# EAGLE board Board (EAGLE 9.6.2)
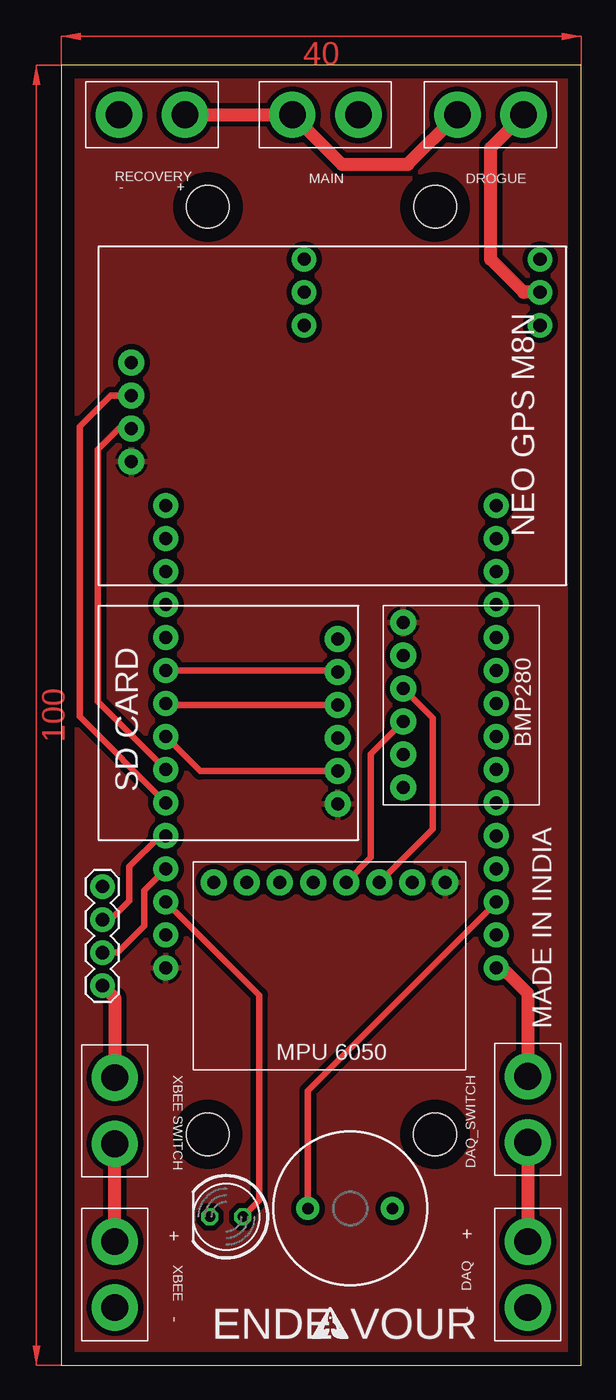
[diagram p0: board, top side]
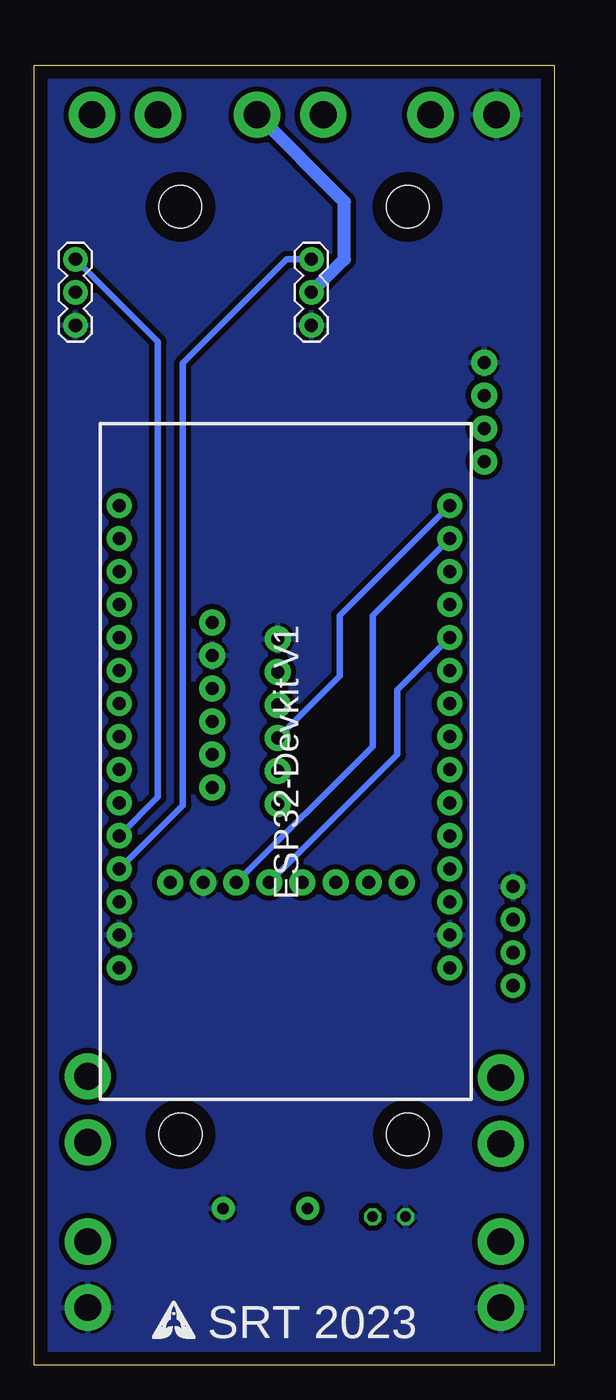
[diagram p1: board, bottom side, seen from below]

Size 40 x 100 mm. Coordinates in mm from the lower left corner, seen from the top.
Outline: 0,0 40,0 40,100 0,100 0,0
Copper layers (1*16): Top 0.035mm / dielectric 1.5mm / Bottom 0.035mm
Design rules "default": minimum track width 6mil, minimum drill 0.35mm, track to track 6mil, track to pad 6mil, pad to pad 6mil, via to via 6mil, smd to smd 6mil, copper to edge 40mil, drill to drill 6mil, minimum pad ring 10mil, minimum via ring 8mil, stop-mask expansion 4mil, vias tented up to drill 0mil, thermal gap 10mil
Holes 3.3 mm at 11.28,89.12 28.76,89.12 11.27,17.77 28.75,17.77

## Footprints (pad centres in the part's own frame; a part is rotated, then mirrored left to right if it is on the bottom)
1X03 = drill 1.016 pad 1.88: 1 0,0; 2 2.54,0; 3 5.08,0
1X02_XTRA_BIG = drill 2.057 pad 3.556: 1 -2.54,0; 2 2.54,0
1X04 = drill 1.016 pad 1.88: 1 0,0; 2 2.54,0; 3 5.08,0; 4 7.62,0
LED5MM = drill 0.813 octagon: A -1.27,0; K 1.27,0
BUZZER-12MM = drill 0.9 pad 1.778: + 3.25,0; - -3.25,0
ESP32-DEVKITV1 = drill 1 pad 1.93: 3V3 -16.52,-12.27; D1 13.96,-12.27; D2 -8.9,-12.27; D3 11.42,-12.27; D4 -6.36,-12.27; D5 1.26,-12.27; D12 -8.9,13.135; D13 -11.44,13.135; D14 -6.36,13.135; D15 -11.44,-12.27; D16 -3.82,-12.27; D17 -1.28,-12.27; D18 3.8,-12.27; D19 6.34,-12.27; D21 8.88,-12.27; D22 16.5,-12.27; D23 19.04,-12.27; D25 1.26,13.135; D26 -1.28,13.135; D27 -3.82,13.135; D32 6.34,13.135; D33 3.8,13.135; D34 11.42,13.135; D35 8.88,13.135; D36 16.5,13.135; D39 13.96,13.135; EN 19.04,13.135; GND@1 -13.98,13.135; GND@2 -13.98,-12.27; VIN -16.52,13.135
BMP280 = drill 1 pad 2: ADO -6.668,5.445; CSB -4.128,5.445; GND 3.493,5.445; SCL 0.953,5.445; SDA -1.587,5.445; VCC 6.032,5.445
MINISD = drill 1 pad 2: 3V3 1.587,15.24; CLK 1.587,7.62; CS 1.587,12.7; GND 1.587,2.54; MISO 1.587,5.08; MOSI 1.587,10.16
MPU6050 = drill 1 pad 2: ADO 1.587,4.128; GND 1.587,16.828; INT 1.587,1.587; SCL 1.587,14.287; SDA 1.587,11.748; VCC 1.587,19.367; XCL 1.587,6.668; XDA 1.587,9.207
NEOM8M = drill 1 pad 2: GND 8.89,2.54; RX 13.97,2.54; TX 11.43,2.54; VCC 16.51,2.54

## Placement (x,y rotation side)
J1  455-1750-1-ND  [1X03]  36.83,80.01 90 bottom
J2  455-1750-1-ND  [1X03]  18.68,80.01 90 bottom
J8  [1X02_XTRA_BIG]  6.99,96.2 180 top
J11  [1X04]  3.17,36.83 270 top
J12  [1X02_XTRA_BIG]  35.88,6.99 270 top
J13  [1X02_XTRA_BIG]  35.88,19.68 90 top
J14  [1X02_XTRA_BIG]  4.13,19.59 90 top
J15  [1X02_XTRA_BIG]  4.13,6.99 90 top
J16  [1X02_XTRA_BIG]  20.32,96.2 0 top
J17  [1X02_XTRA_BIG]  33.02,96.2 0 top
LED1  [LED5MM]  12.7,11.43 180 top
LS1  BUZZER-PTH  [BUZZER-12MM]  22.23,12.06 180 top
U$1  ESP32DEVKITV1  [ESP32-DEVKITV1]  20.32,47.1 90 bottom
U$2  BMP280  [BMP280]  31.75,51.12 90 top
U$3  MINISD  [MINISD]  22.86,58.42 180 top
U$4  MPU6050  [MPU6050]  10.16,38.73 270 top
U$5  NEOM8N  [NEOM8M]  2.86,86.04 270 top

## Library data of the parts
J1 J2 = SparkFun-Connectors; PROD_ID: XXX-00000
J8 J12-J17 = SparkFun-Connectors
J11 = SparkFun-Connectors; PROD_ID: CONN-09696
LED1 = led
LS1 = SparkFun-Electromechanical; PROD_ID: COMP-08253; SF_SKU: COM-07950
U$1 = ESP32-DEVKITV1
U$2 = BMP 280
U$3 = MINI SD CARD
U$4 = MPU6050
U$5 = neo gps m8n

## Nets
3V3: U$1.3V3 U$2.VCC U$3.3V3 U$4.VCC U$5.VCC
BUZZER: LS1.+ U$1.D13
CLK: U$1.D18 U$3.CLK
CS: U$1.D5 U$3.CS
DAQ_SWITCH: J12.1 J13.1
DAQ_VIN: J13.2 U$1.VIN
DROGUE: J1.3 U$1.D14
GND: J1.1 J2.1 J8.2 J11.1 J12.2 J15.1 LED1.K LS1.- U$1.GND@1 U$1.GND@2 U$2.GND U$3.GND U$4.GND U$5.GND
GPS_RX: U$1.D17 U$5.RX
GPS_TX: U$1.D16 U$5.TX
LED: LED1.A U$1.D15
MAIN: J2.3 U$1.D12
MISO: U$1.D19 U$3.MISO
MOSI: U$1.D23 U$3.MOSI
NICHROME: J8.1 J16.1 J17.1
SCL: U$1.D22 U$2.SCL U$4.SCL
SDA: U$1.D21 U$2.SDA U$4.SDA
TERMINAL1: J2.2 J16.2
TERMINAL2: J1.2 J17.2
XBEE_RX: J11.2 U$1.D4
XBEE_SWITCH: J14.1 J15.2
XBEE_TX: J11.3 U$1.D2
XBEE_VIN: J11.4 J14.2

## Tracks (layer width: path | path; a pad name or v marks a point on that pad's centre or on a via)
3V3
  pour Top (isolate 0.4): 0,0 40.01,0 40.01,100.64 0,100.64
BUZZER
  Top 0.508: LS1.+ 18.98,14.13 18.98,21.12 33.45,35.6 U$1.D13
CLK
  Top 0.508: U$3.CLK 8.15,50.8 U$1.D18
CS
  Top 0.508: U$3.CS 10.69,45.72 U$1.D5
DAQ_SWITCH
  Top 1.016: J13.1 J12.1
DAQ_VIN
  Top 1.016: J13.2 35.88,28.61 33.91,30.58 U$1.VIN
DROGUE
  Bottom 0.508: J1.3 30.48,78.74 30.48,43.72 U$1.D14
GND
  pour Bottom (isolate 0.4): 0,0 40,0 40,100 0,100
GPS_RX
  Top 0.508: U$1.D17 2.81,51.06 2.81,70.43 4.45,72.07 U$5.RX
GPS_TX
  Top 0.508: U$5.TX 3.81,74.61 1.43,72.23 1.43,49.9 U$1.D16
LED
  Top 0.508: LED1.A 15.24,12.7 15.24,28.47 U$1.D15
MAIN
  Bottom 0.508: J2.3 20.59,85.09 28.57,77.11 28.57,43.08 U$1.D12
MISO
  Top 0.508: U$1.D19 21.17,53.44 U$3.MISO
MOSI
  Bottom 0.508: U$3.MOSI 16.51,53.02 16.51,57.68 U$1.D23
NICHROME
  Top 1.016: J8.1 J16.1 21.59,92.39 26.67,92.39 J17.1
SCL
  Top 0.508: U$4.SCL 28.57,41.27 28.57,49.8 U$2.SCL
  Bottom 0.508: U$4.SCL 13.97,47.62 13.97,57.68 U$1.D22
SDA
  Top 0.508: U$4.SDA 23.81,39.05 23.81,47.04 U$2.SDA
  Bottom 0.508: U$4.SDA 12.06,46.99 12.06,51.97 U$1.D21
TERMINAL1
  Bottom 1.016: J2.2 16.14,85.09 16.14,89.49 J16.2
TERMINAL2
  Top 1.016: J1.2 35.56,82.55 33.02,85.09 33.02,93.66 J17.2
XBEE_RX
  Top 0.508: U$1.D4 7.61,40.74 5.24,38.37 5.24,35.72 3.81,34.29 J11.2
XBEE_SWITCH
  Top 1.016: J15.2 J14.1
XBEE_TX
  Top 0.508: J11.3 4.33,31.75 6.38,33.79 6.38,36.52 U$1.D2
XBEE_VIN
  Top 1.016: J11.4 4.13,28.26 J14.2
(copper drawn outside any net)
  shapes: Top area x2

## Text on the board
tNames: RECOVERY | MAIN | DROGUE | - | + | MADE IN INDIA | XBEE SWITCH | DAQ_SWITCH | + | + | XBEE | DAQ | - | - | ENDE | VOUR
bNames: SRT 2023